# Altium PCB SensorBoard.PcbDoc
Units mm, origin at the board's own origin, x right, y up, seen from the top; angles counter-clockwise.
Board outline 40 x 40 mm, 2 copper layers (Top Layer, Bottom Layer); 3 components, 8 nets, 29 pads, 0 vias.
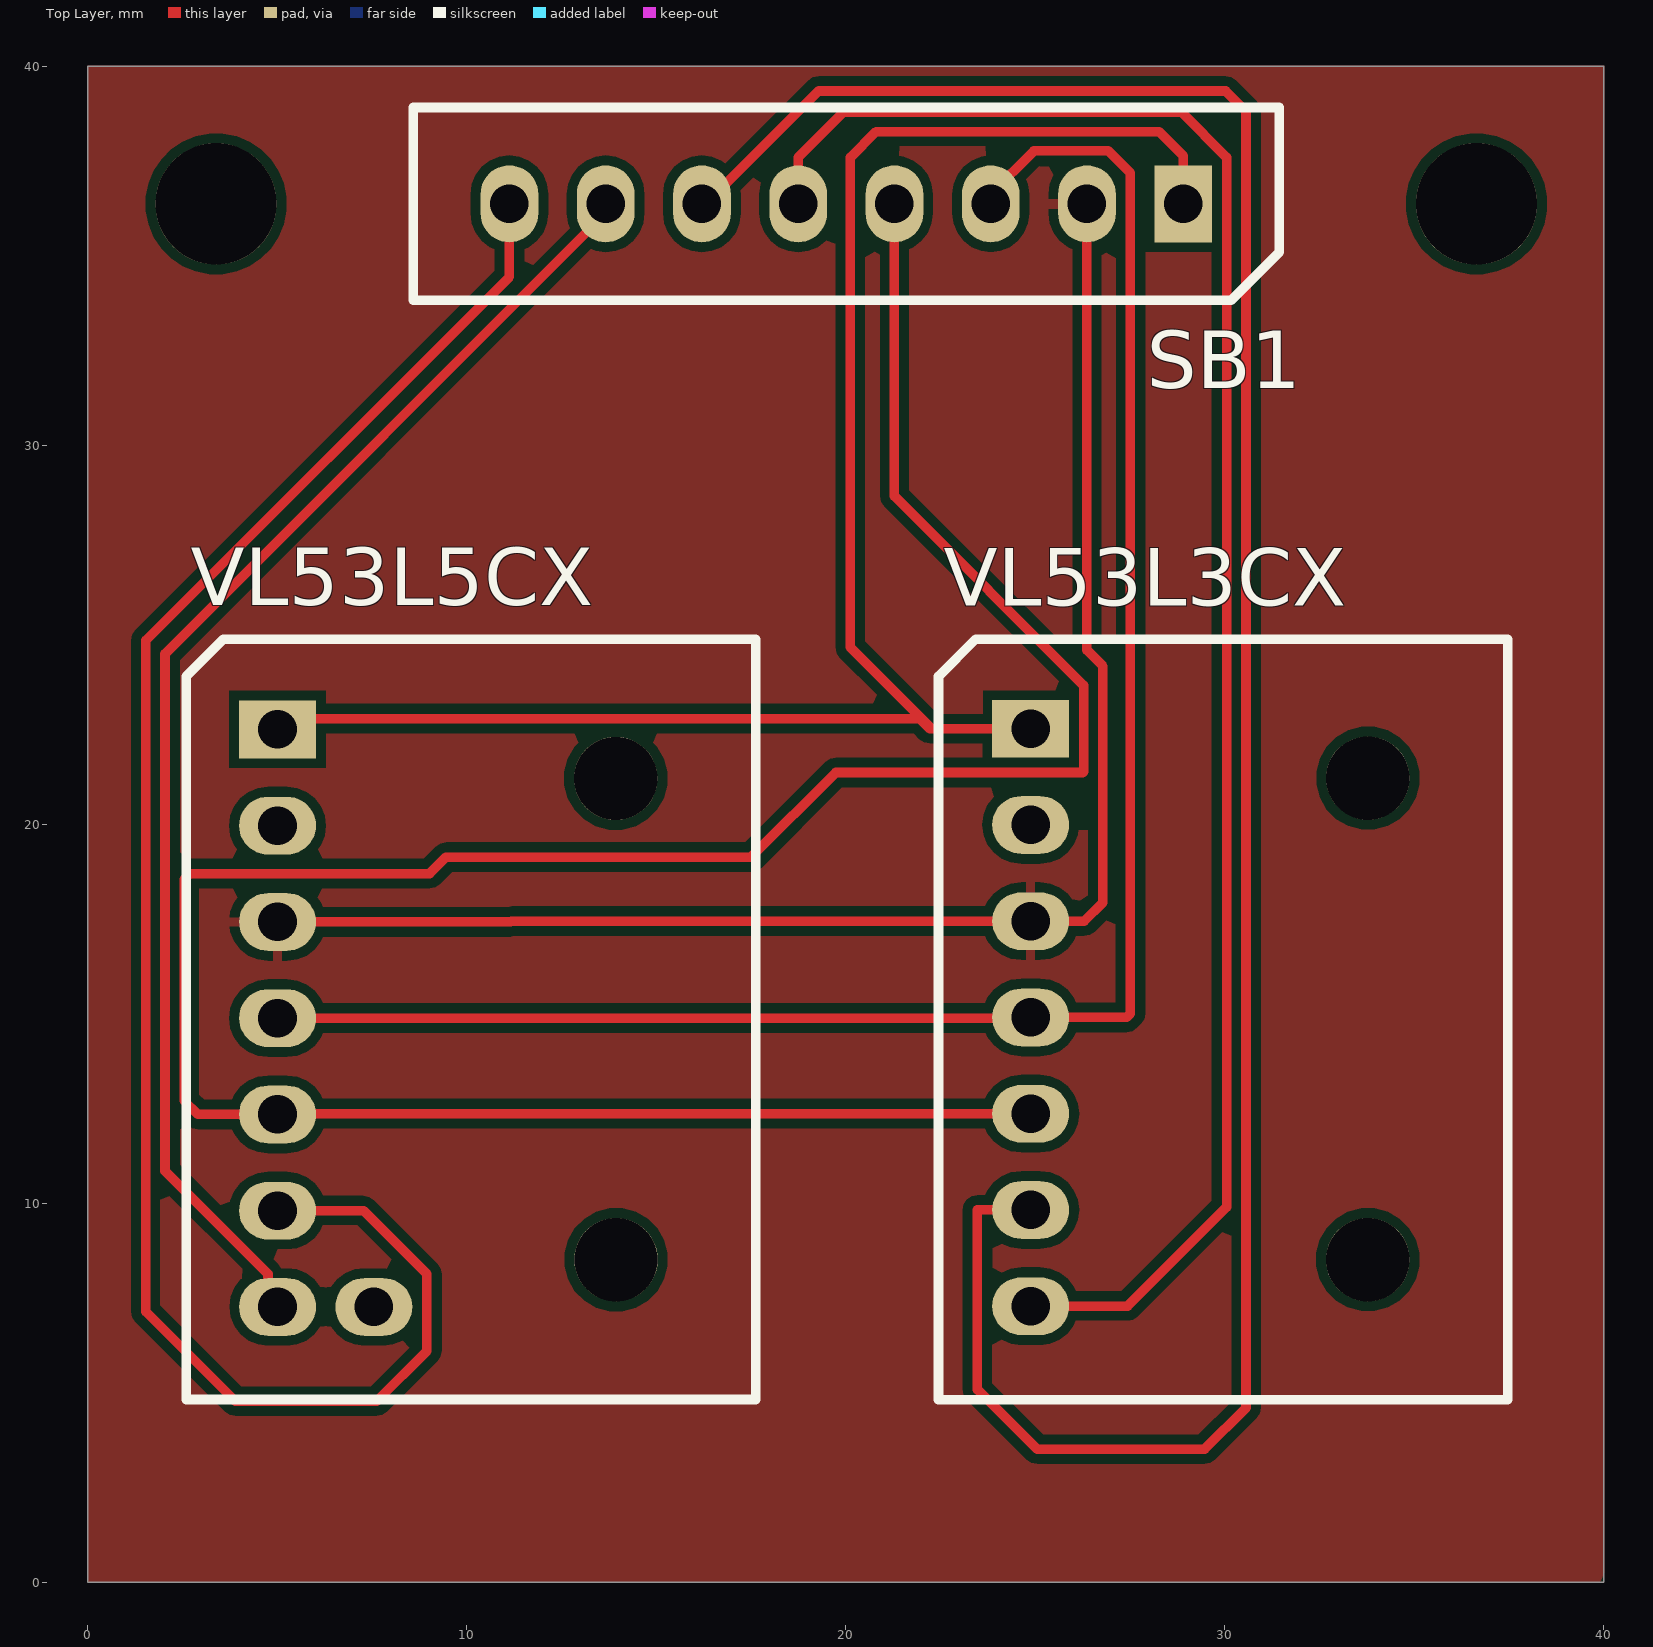
[diagram p0: Top Layer view]
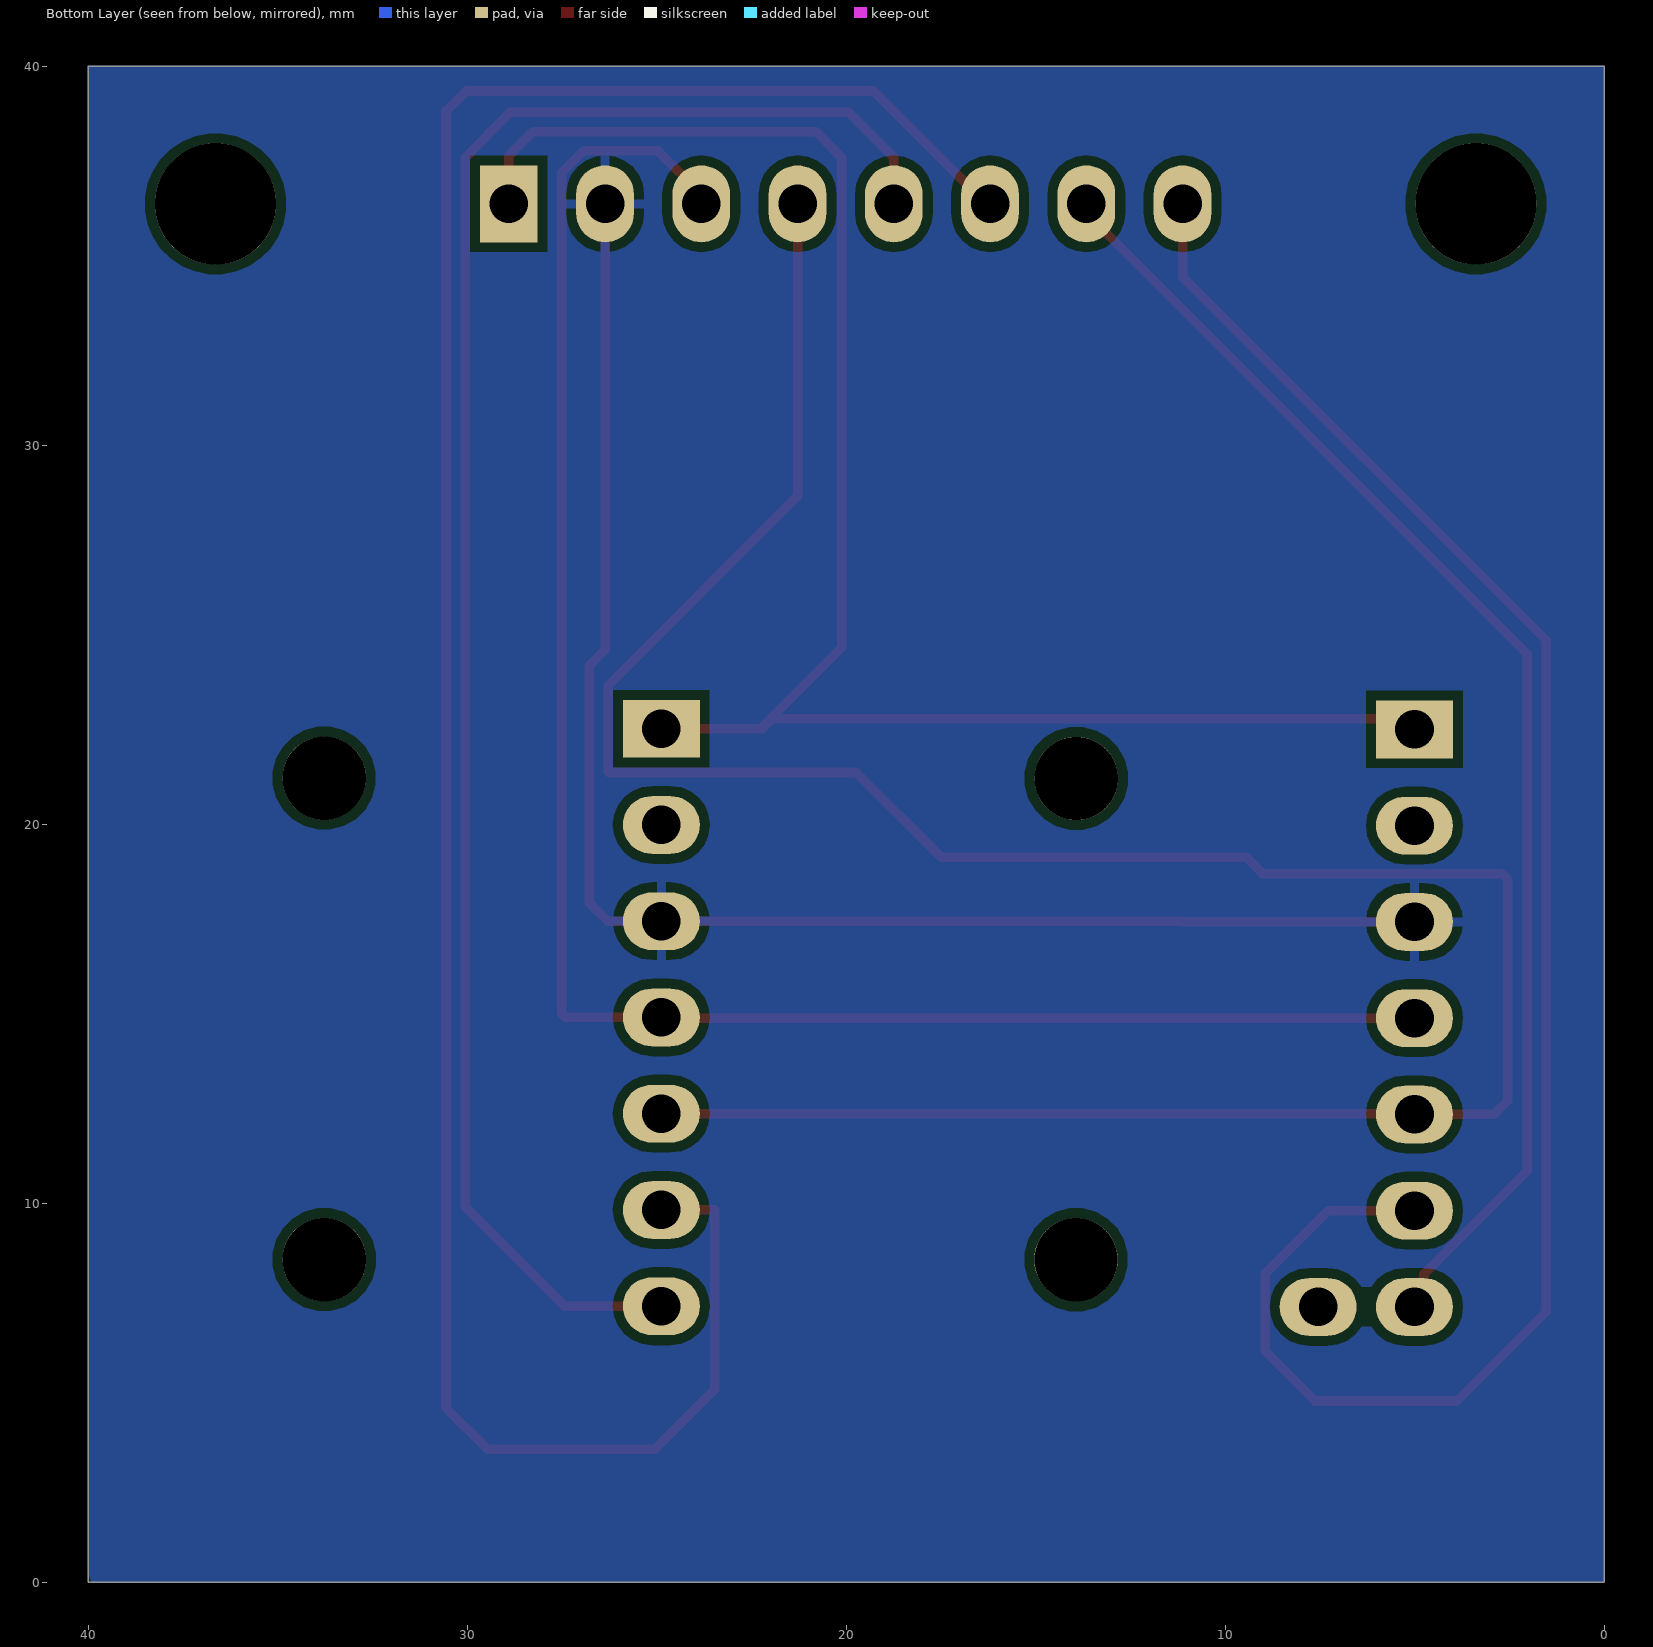
[diagram p1: Bottom Layer view, seen from below]

## Layer stack, top to bottom
Top Solder: solder mask 0.0102, Solder Resist, Dk 3.5
Top Layer: signal copper 0.0356
Dielectric 1: dielectric 0.32, FR-4, Dk 4.8
Bottom Layer: signal copper 0.0356
Bottom Solder: solder mask 0.0102, Solder Resist, Dk 3.5

## Board outline
0,0 40,0 40,40 0,40

## Design rules (kind name [scope] priority, off if disabled: settings)
Clearance [All] p1: gap=0.254 ignorepadtopadclearanceinfootprint=FALSE
HoleSize [All] p1 off: absolutevalues=TRUE maxlimit=2.54 minlimit=0.025 maxpercent=80.000 minpercent=20.000
PolygonConnect [All] p1: connectstyle=Relief reliefconductorwidth=0.254 reliefentries=4 polygonreliefangle="90 Angle" airgapwidth=0.254
RoutingVias [All] p1: holewidth=0.711 width=1.27 viastyle="Through Hole" minholewidth=0.711 minwidth=1.27 maxholewidth=0.711 maxwidth=1.27
SolderMaskExpansion [All] p1: expansion=0.102 istentingtop=FALSE
Width [All] p1: maxlimit=0.254 minlimit=0.254 preferedwidth=0.254
29 further rules are at their usual default settings.

## Classes and differential pairs
component class SensorBoard: SB1

## Components (designator, comment, footprint, x,y, rotation, side; value= is the part's Value field where it differs from the comment)
SB1 "HEADER_SENSOR_BOARD" HEADER_SENSOR_BOARD 28.9,36.368 r180 top
VL53L3CX "HEADER_VL53L3CX" HEADER_VL53L3CX 24.86,22.5 r90 top
VL53L5CX "HEADER_VL53L5CX" HEADER_VL53L5CX 5,22.5 r90 top

## Footprints (in the part's own frame and the unit in brackets; to place one, negate y for a bottom-side part, rotate by r counter-clockwise, add the part's x,y. Pads: shape width x height; smd on the part's side, far side on the other; paste and mask are expansions set on the pad)
HEADER_SENSOR_BOARD [mil]
  rect 60x80 hole 40.16: 1(0,0)
  oval 60x80 hole 40.16: 2(100,0) 3(200,0) 4(300,0) 5(400,0) 6(500,0) 7(600,0) 8(700,0)
  round 125.98 hole 125.98: ""(-304.72,0) ""(1004.73,0)
  silkscreen extent -100,-100 800,100
HEADER_VL53L3CX [mm]
  rect 1.524x2.032 hole 1.02: 1(0.019,-0.015)
  oval 1.524x2.032 hole 1.02: 2(-2.521,-0.015) 3(-5.061,-0.015) 4(-7.601,-0.015) 5(-10.141,-0.015) 6(-12.681,-0.015) 7(-15.221,-0.015)
  round 2.2 hole 2.2: ""(-13.994,-8.911) ""(-1.286,-8.914)
  silkscreen extent -17.69,-12.6 2.38,2.42, body extent -16.53,-11.46 1.27,1.27, height 10.85
HEADER_VL53L5CX [mil]
  rect 60x80 hole 40.16: 1(-0.03,-0.06)
  oval 60x80 hole 40.16: 2(-100.03,-0.06) 3(-200.03,-0.06) 4(-300.03,-0.06) 5(-400.03,-0.06) 6(-500.03,-0.06) 7(-600.03,-0.06) 8(-600.03,-100.06)
  round 86.61 hole 86.61: ""(-550.97,-351.75) ""(-50.99,-351.39)
  silkscreen extent -696,-497 94,95, body extent -651,-452 50,50, height 441

## Part data
SB1: "Sensor Board header"
VL53L3CX: "VL53L3CX Time-of-Flight Multi-Target Distance Sensor Carrier with Voltage Regulator, 500cm Max"
VL53L5CX: "VL53L5CX Time-of-Flight 8×8-Zone Distance Sensor Carrier with Voltage Regulator, 400cm Max"

## Nets (pads, with @x,y where several pads share a name; then routed paths per layer and width w, separated by ;. In a path a pad name is that pad's centre, name@x,y a point inside that pad or via, vN(x,y) a via of type N, cw(c..) or ccw(c..) an arc to the next point about the centre after c; other vN are vias at no path point)
GND: SB1.2 VL53L3CX.3 VL53L5CX.3 | length 40.6
  Top Layer w0.254: VL53L5CX.3 11.157,17.419 11.176,17.439 VL53L3CX.3 26.289,17.439 26.78,17.93 26.78,24.17 26.36,24.59 SB1.2
S1_GPIO: SB1.6 VL53L3CX.6 | length 64.5
  Top Layer w0.254: SB1.6 16.2,36.627 16.561,36.627 19.279,39.345 30.023,39.345 30.556,38.811 30.556,4.597 29.464,3.505 25.044,3.505 23.47,5.08 23.47,9.819 VL53L3CX.6
S1_INT: SB1.5 VL53L3CX.7 | length 47.5
  Top Layer w0.254: SB1.5 18.74,37.592 19.934,38.786 28.854,38.786 30.048,37.592 30.048,9.895 27.432,7.279 VL53L3CX.7
S2_GPIO: SB1.8 VL53L5CX.6 | length 48.8
  Top Layer w0.254: VL53L5CX.6 7.269,9.799 8.941,8.128 8.941,6.096 7.62,4.775 3.886,4.775 1.524,7.137 1.524,24.846 11.12,34.442 SB1.8
S2_INT: SB1.7 VL53L5CX.7 | length 35.3
  Top Layer w0.254: VL53L5CX.7 4.75,7.259 4.75,8.128 2.032,10.846 2.032,24.491 13.66,36.119 SB1.7
SCL: SB1.4 VL53L3CX.5 VL53L5CX.5 | length 70.3
  Top Layer w0.254: VL53L5CX.5@5.447,12.339 VL53L5CX.5 2.901,12.339 2.54,12.7 2.54,18.546 2.689,18.694 9.017,18.694 9.449,19.126 17.501,19.126 19.736,21.361 26.247,21.361 26.272,21.387 26.272,23.662 21.28,28.654 SB1.4 ; VL53L5CX.5@5.447,12.359 24.568,12.359 VL53L3CX.5
SDA: SB1.3 VL53L3CX.4 VL53L5CX.4 | length 49.4
  Top Layer w0.254: VL53L5CX.4 24.553,14.879 24.573,14.859 24.613,14.899 VL53L3CX.4 27.407,14.899 27.508,15 27.508,37.181 26.924,37.765 24.958,37.765 23.82,36.627 SB1.3
VDD: SB1.1 VL53L3CX.1 VL53L5CX.1 | length 46.7
  Top Layer w0.254: VL53L5CX.1 5.258,22.499 5.542,22.784 21.946,22.784 22.211,22.519 22.261,22.519 ; VL53L3CX.1 22.261,22.519 ; SB1.1 28.9,37.638 28.265,38.273 20.798,38.273 20.117,37.592 20.117,24.663 22.261,22.519
pads on no net: SB1. VL53L3CX. VL53L3CX.2 VL53L5CX. VL53L5CX.2 VL53L5CX.8

## Polygon pours and split planes (outlines as drawn)
GND on Top Layer "GND_L01_P001" (solid, pour order 1): 0,40.005 40.005,40.005 40.005,0.254 40.132,0.127 40.005,0 0,0
GND on Bottom Layer "GND_L02_P000" (solid, pour order 0): 0,40.005 40.005,40.005 40.005,0.254 40.132,0.127 40.005,0 0,0